# EAGLE board termo2 (EAGLE 6.2)

Size 160 x 100 mm. Coordinates in mm from the lower left corner, seen from the top.
Outline: 0,0 160,0 160,100 0,100 0,0
Copper layers (1*16): Top 0.035mm / dielectric 1.5mm / Bottom 0.035mm
Design rules: minimum track width 10mil, minimum drill 24mil, track to track 8mil, track to pad 8mil, pad to pad 8mil, via to via 8mil, smd to smd 8mil, copper to edge 40mil, drill to drill 8mil, minimum pad ring 10mil, minimum via ring 8mil, stop-mask expansion 4mil, vias tented up to drill 0mil, thermal gap 10mil

## Footprints (pad centres in the part's own frame; a part is rotated, then mirrored left to right if it is on the bottom)
8_PIN_CON = drill 1 pad 1.778 square: P$1 -12.7,0.635 | drill 1 pad 1.778: P$2 -8.89,0.635; P$3 -5.08,0.635; P$4 -1.27,0.635; P$5 2.54,0.635; P$6 6.35,0.635; P$7 10.16,0.635; P$8 13.97,0.635
C100MILX6X12 = drill 0.8 pad 1.422 octagon: MINUS 1.27,0 | drill 0.8 pad 1.422 square: PLUS -1.27,0
C0805D = smd 1.5 x 1.7: 1 -1.27,0; 2 1.27,0
C0603 = smd 1.1 x 1: 1 -0.85,0; 2 0.85,0
DIL08 = drill 0.8 pad 1.422 square: 1 -3.81,-3.81 | drill 0.8 pad 1.422 long: 2 -1.27,-3.81; 3 1.27,-3.81; 4 3.81,-3.81; 5 3.81,3.81; 6 1.27,3.81; 7 -1.27,3.81; 8 -3.81,3.81
DO41-10 = drill 1 pad 2.184 octagon: A 12.7,0 | drill 1 pad 2.184 square: C 0,0
NMA = drill 0.813 long: 1 0,6.35; 2 0,3.81; 4 0,-1.27; 5 0,-3.81; 6 0,-6.35
DIL08' = drill 0.813 pad 1.6 octagon: 1 -3.81,-3.81; 2 -1.27,-3.81; 3 1.27,-3.81; 4 3.81,-3.81; 5 3.81,3.81; 6 1.27,3.81; 7 -1.27,3.81; 8 -3.81,3.81
SO08 = smd 0.61 x 2.21: 1 -1.905,-2.616; 2 -0.635,-2.616; 3 0.635,-2.616; 4 1.905,-2.616; 5 1.905,2.616; 6 0.635,2.616; 7 -0.635,2.616; 8 -1.905,2.616
TO92-60 = drill 0.8 pad 1.422 octagon: 1 -1.524,0; 2 0,1.524; 3 1.524,0
SOT89-5 = smd 0.8 x 1.4: 1 -1.499,-1.981; 2 0,-1.981; 3 1.499,-1.981; 4 1.499,1.919; 5 -1.499,1.919; 21 0,1.919
DIL40 = drill 0.813 long: 1 -24.13,-7.62; 2 -21.59,-7.62; 3 -19.05,-7.62; 4 -16.51,-7.62; 5 -13.97,-7.62; 6 -11.43,-7.62; 7 -8.89,-7.62; 8 -6.35,-7.62; 9 -3.81,-7.62; 10 -1.27,-7.62; 11 1.27,-7.62; 12 3.81,-7.62; 13 6.35,-7.62; 14 8.89,-7.62; 15 11.43,-7.62; 16 13.97,-7.62; 17 16.51,-7.62; 18 19.05,-7.62; 19 21.59,-7.62; 20 24.13,-7.62; 21 24.13,7.62; 22 21.59,7.62; 23 19.05,7.62; 24 16.51,7.62; 25 13.97,7.62; 26 11.43,7.62; 27 8.89,7.62; 28 6.35,7.62; 29 3.81,7.62; 30 1.27,7.62; 31 -1.27,7.62; 32 -3.81,7.62; 33 -6.35,7.62; 34 -8.89,7.62; 35 -11.43,7.62; 36 -13.97,7.62; 37 -16.51,7.62; 38 -19.05,7.62; 39 -21.59,7.62; 40 -24.13,7.62
ADS1216_PAC = smd 0.25 x 1.5: 1 -2.52,-3.258; 2 -2.02,-3.258; 3 -1.52,-3.258; 4 -1.02,-3.258; 5 -0.52,-3.258; 6 -0.02,-3.258; 7 0.48,-3.258; 8 0.98,-3.258; 9 1.48,-3.258; 10 1.98,-3.258; 11 2.48,-3.258; 12 2.98,-3.258; 25 2.955,5.792; 26 2.455,5.792; 27 1.955,5.792; 28 1.455,5.792; 29 0.955,5.792; 30 0.455,5.792; 31 -0.045,5.792; 32 -0.545,5.792; 33 -1.045,5.792; 34 -1.545,5.792; 35 -2.045,5.792; 36 -2.533,5.785 | smd 1.5 x 0.25: 13 4.73,-1.483; 14 4.73,-0.983; 15 4.73,-0.483; 16 4.73,0.017; 17 4.73,0.517; 18 4.73,1.017; 19 4.73,1.517; 20 4.73,2.017; 21 4.73,2.517; 22 4.73,3.017; 23 4.73,3.517; 24 4.73,4.017; 37 -4.32,4.017; 38 -4.32,3.517; 39 -4.32,3.017; 40 -4.32,2.517; 41 -4.32,2.017; 42 -4.32,1.517; 43 -4.32,1.017; 44 -4.32,0.517; 45 -4.32,0.017; 46 -4.32,-0.483; 47 -4.32,-0.983; 48 -4.32,-1.483
CNY_DIP8 = drill 0.8 pad 1.422 square: 1 -3.81,-3.81 | drill 0.8 pad 1.422 long: 2 -1.27,-3.81; 3 1.27,-3.81; 4 3.81,-3.81; 5 3.81,3.81; 6 1.27,3.81; 7 -1.27,3.81; 8 -3.81,3.81
FUSE5X20 = drill 1.2 pad 3.81 octagon: P$1 -10,0; P$2 10,0
TQFP64-10X10 = smd 1.7 x 0.3: 1 -5.7,3.75; 2 -5.7,3.25; 3 -5.7,2.75; 4 -5.7,2.25; 5 -5.7,1.75; 6 -5.7,1.25; 7 -5.7,0.75; 8 -5.7,0.25; 9 -5.7,-0.25; 10 -5.7,-0.75; 11 -5.7,-1.25; 12 -5.7,-1.75; 13 -5.7,-2.25; 14 -5.7,-2.75; 15 -5.7,-3.25; 16 -5.7,-3.75; 33 5.7,-3.75; 34 5.7,-3.25; 35 5.7,-2.75; 36 5.7,-2.25; 37 5.7,-1.75; 38 5.7,-1.25; 39 5.7,-0.75; 40 5.7,-0.25; 41 5.7,0.25; 42 5.7,0.75; 43 5.7,1.25; 44 5.7,1.75; 45 5.7,2.25; 46 5.7,2.75; 47 5.7,3.25; 48 5.7,3.75 | smd 0.3 x 1.7: 17 -3.75,-5.7; 18 -3.25,-5.7; 19 -2.75,-5.7; 20 -2.25,-5.7; 21 -1.75,-5.7; 22 -1.25,-5.7; 23 -0.75,-5.7; 24 -0.25,-5.7; 25 0.25,-5.7; 26 0.75,-5.7; 27 1.25,-5.7; 28 1.75,-5.7; 29 2.25,-5.7; 30 2.75,-5.7; 31 3.25,-5.7; 32 3.75,-5.7; 49 3.75,5.7; 50 3.25,5.7; 51 2.75,5.7; 52 2.25,5.7; 53 1.75,5.7; 54 1.25,5.7; 55 0.75,5.7; 56 0.25,5.7; 57 -0.25,5.7; 58 -0.75,5.7; 59 -1.25,5.7; 60 -1.75,5.7; 61 -2.25,5.7; 62 -2.75,5.7; 63 -3.25,5.7; 64 -3.75,5.7
1_PIN_CON = drill 1 pad 1.676 octagon: P$1 0,0
HC49/S = drill 0.813: 1 -2.413,0; 2 2.413,0
V235/17 = drill 1.194 octagon: 1 -8.89,0; 2 8.89,0
R0805D = smd 1.5 x 1.7: P$1 -1.27,0; P$2 1.27,0
0207/10 = drill 0.8 pad 1.676 octagon: 1 -5.08,0; 2 5.08,0
RTRIM3329H = drill 0.8 pad 1.422 octagon: 1 -0.599,-2.024; 2 1.805,-1.985; 3 0.537,0.066
6_IN_PINS = drill 1 pad 1.422 square: P$1 0,0 | drill 1 pad 1.422 octagon: P$2 2.54,0; P$3 5.08,0; P$4 7.62,0; P$5 10.16,0; P$6 12.7,0
PLC-5PIN = drill 1 square: P$1 0,5.08 | drill 1 octagon: P$2 0,2.54; P$3 0,0; P$4 0,-2.54; P$5 0,-5.08
PLC-3PIN = drill 1 pad 1.778 square: P$1 0,0 | drill 1 pad 1.778 octagon: P$2 2.54,0; P$3 5.08,0
KM_RS_232 = drill 1 pad 1.778 square: 1 20.32,5.08 | drill 1 pad 1.778: 2 20.32,2.54; 3 20.32,0; 4 20.32,-2.54; 5 20.32,-5.08 | hole 3.2: -10.16,17.78; -10.16,-17.78; 17.78,17.78; 17.78,-17.78
WINSTAR16X4_12 = drill 1 pad 1.778 square: P$1 -13.97,1.27 | drill 1 pad 1.778 octagon: P$2 -11.43,1.27; P$3 -8.89,1.27; P$4 -6.35,1.27; P$5 -3.81,1.27; P$6 -1.27,1.27; P$7 1.27,1.27; P$8 3.81,1.27; P$9 6.35,1.27; P$10 8.89,1.27; P$11 11.43,1.27; P$12 13.97,1.27

## Placement (x,y rotation side)
8_PIN_  [8_PIN_CON]  -38.1,139.7 0 top  (outside the outline)
C1  [C100MILX6X12]  -41.91,100.33 0 top  (outside the outline)
C2  0.1u  [C0805D]  -97.79,110.49 0 top  (outside the outline)
C3  0.1u  [C0805D]  -102.87,110.49 0 top  (outside the outline)
C4  0.1u  [C0805D]  -107.95,110.49 0 top  (outside the outline)
C5  0.1u  [C0805D]  -113.03,110.49 0 top  (outside the outline)
C6  [C100MILX6X12]  -49.53,100.33 0 top  (outside the outline)
C7  [C0805D]  -15.24,139.7 0 top  (outside the outline)
C8  [C0805D]  -20.32,139.7 0 top  (outside the outline)
C9  [C100MILX6X12]  -57.15,100.33 0 top  (outside the outline)
C10  0.1u  [C0603]  -50.8,125.73 0 top  (outside the outline)
C11  0.1u  [C0805D]  -16.51,119.38 0 top  (outside the outline)
C12  [C0805D]  -27.94,134.62 0 top  (outside the outline)
C13  0.1u  [C0805D]  -21.59,119.38 0 top  (outside the outline)
C14  [C0805D]  -33.02,134.62 0 top  (outside the outline)
C15  0.01u  [C0805D]  -86.36,110.49 0 top  (outside the outline)
C16  1u  [C0805D]  -41.91,119.38 0 top  (outside the outline)
C17  0.1u  [C0603]  -55.88,125.73 0 top  (outside the outline)
C18  [C0805D]  -38.1,134.62 0 top  (outside the outline)
C19  12p  [C0805D]  -46.99,119.38 0 top  (outside the outline)
C20  0.1u  [C0805D]  -26.67,119.38 0 top  (outside the outline)
C21  1n  [C0603]  -76.2,125.73 0 top  (outside the outline)
C22  0.1u  [C0805D]  -31.75,119.38 0 top  (outside the outline)
C23  0.1u  [C0603]  -60.96,125.73 0 top  (outside the outline)
C24  12p  [C0805D]  -52.07,119.38 0 top  (outside the outline)
C25  0.1u  [C0603]  -66.04,125.73 0 top  (outside the outline)
C26  [C0603]  -55.88,139.7 0 top  (outside the outline)
C27  0.1u  [C0603]  -71.12,125.73 0 top  (outside the outline)
C28  0.1u  [C0805D]  -36.83,119.38 0 top  (outside the outline)
C29  [C100MILX6X12]  -64.77,100.33 0 top  (outside the outline)
C30  1u  [C0805D]  -57.15,119.38 0 top  (outside the outline)
C31  0.01u  [C0805D]  -92.71,110.49 0 top  (outside the outline)
C32  [C0805D]  -43.18,134.62 0 top  (outside the outline)
C33  [C0805D]  -48.26,134.62 0 top  (outside the outline)
C34  [C0805D]  -53.34,134.62 0 top  (outside the outline)
C35  [C0805D]  -58.42,134.62 0 top  (outside the outline)
C36  1n  [C0805D]  -62.23,119.38 0 top  (outside the outline)
C37  [C0805D]  -63.5,134.62 0 top  (outside the outline)
C38  [C0805D]  -68.58,134.62 0 top  (outside the outline)
C39  [C0805D]  -73.66,134.62 0 top  (outside the outline)
C40  0.1  [C0805D]  -67.31,119.38 0 top  (outside the outline)
C41  0.1  [C0805D]  -72.39,119.38 0 top  (outside the outline)
C42  0.1  [C0805D]  -77.47,119.38 0 top  (outside the outline)
C43  0.1  [C0805D]  -82.55,119.38 0 top  (outside the outline)
C44  12p  [C0805D]  -142.24,-11.43 0 top  (outside the outline)
C45  12p  [C0805D]  -142.24,-17.78 0 top  (outside the outline)
C46  0.1u  [C0603]  -156.21,-24.13 0 top  (outside the outline)
D1  6N137  [DIL08]  -106.68,69.85 0 top  (outside the outline)
D2  1N5061  [DO41-10]  -81.28,110.49 0 top  (outside the outline)
DA1  [NMA]  -74.93,38.1 0 top  (outside the outline)
DA2  INA128P  [DIL08']  -80.01,88.9 0 top  (outside the outline)
DA3  OPA340U  [SO08]  -92.71,87.63 0 top  (outside the outline)
DA4  DS1811  [TO92-60]  -27.94,100.33 0 top  (outside the outline)
DA5  NJM2880  [SOT89-5]  -104.14,88.9 0 top  (outside the outline)
DA6  PIC18F4320_40  [DIL40]  -36.83,54.61 0 top  (outside the outline)
DA7  ADS1216ADS1216  [ADS1216_PAC]  -54.61,77.47 270 top  (outside the outline)
DA8  NJM2880  [SOT89-5]  -19.05,101.6 0 top  (outside the outline)
DA9  CNY74-H  [CNY_DIP8]  -19.05,90.17 0 top  (outside the outline)
DA10  CNY74-H  [CNY_DIP8]  -34.29,90.17 0 top  (outside the outline)
FU1  [FUSE5X20]  -123.19,67.31 90 top  (outside the outline)
IC1  PIC24HJ64GP506  [TQFP64-10X10]  -151.13,-13.97 0 top  (outside the outline)
P1  1_PIN_CON  [1_PIN_CON]  -58.42,139.7 0 top  (outside the outline)
P2  1_PIN_CON  [1_PIN_CON]  -60.96,139.7 0 top  (outside the outline)
Q1  [HC49/S]  -49.53,109.22 0 top  (outside the outline)
Q2  [HC49/S]  -60.96,109.22 0 top  (outside the outline)
Q3  [HC49/S]  -138.43,-5.08 0 top  (outside the outline)
R1  100k  [V235/17]  -78.74,99.06 0 top  (outside the outline)
R2  100k  [V235/17]  -99.06,99.06 0 top  (outside the outline)
R3  50k  [V235/17]  -22.86,110.49 0 top  (outside the outline)
R4  10k  [R0805D]  -113.03,119.38 0 top  (outside the outline)
R5  330  [0207/10]  -83.82,124.46 0 top  (outside the outline)
R6  1k  [0207/10]  -96.52,124.46 0 top  (outside the outline)
R7  1k  [0207/10]  -109.22,124.46 0 top  (outside the outline)
R8  22R  [R0805D]  -87.63,119.38 0 top  (outside the outline)
R9  [RTRIM3329H]  -35.56,100.33 0 top  (outside the outline)
R10  22R  [R0805D]  -92.71,119.38 0 top  (outside the outline)
R11  100k  [0207/10]  -19.05,129.54 0 top  (outside the outline)
R12  4k7  [0207/10]  -31.75,129.54 0 top  (outside the outline)
R13  4k7  [0207/10]  -44.45,129.54 0 top  (outside the outline)
R14  4k7  [0207/10]  -57.15,129.54 0 top  (outside the outline)
R15  4k7  [0207/10]  -69.85,129.54 0 top  (outside the outline)
R16  [R0805D]  -78.74,134.62 0 top  (outside the outline)
R17  1k  [R0805D]  -97.79,119.38 0 top  (outside the outline)
R18  [R0805D]  -83.82,134.62 0 top  (outside the outline)
R19  [R0805D]  -88.9,134.62 0 top  (outside the outline)
R20  [R0805D]  -93.98,134.62 0 top  (outside the outline)
R21  [R0805D]  -99.06,134.62 0 top  (outside the outline)
R22  [R0805D]  -104.14,134.62 0 top  (outside the outline)
R23  [R0805D]  -109.22,134.62 0 top  (outside the outline)
R24  10k  [R0805D]  -102.87,119.38 0 top  (outside the outline)
R25  330  [0207/10]  -82.55,129.54 0 top  (outside the outline)
R26  330  [0207/10]  -95.25,129.54 0 top  (outside the outline)
R27  330  [0207/10]  -107.95,129.54 0 top  (outside the outline)
R28  330  [0207/10]  -19.05,134.62 0 top  (outside the outline)
R29  22R  [R0805D]  -107.95,119.38 0 top  (outside the outline)
X1  6_PIN_CON  [6_IN_PINS]  -58.42,88.9 0 top  (outside the outline)
X2  [PLC-5PIN]  -67.31,54.61 180 top  (outside the outline)
X3  [PLC-3PIN]  -40.64,109.22 0 top  (outside the outline)
X4  [KM_RS_232]  -36.83,21.59 0 top  (outside the outline)
X5  [WINSTAR16X4_12]  -27.94,125.73 0 top  (outside the outline)

## Library data of the parts
8_PIN_ DA7 DA9 DA10 P1 P2 R9 X1 X4 X5 = Dmitry
C1-C9 C11-C16 C18-C20 C22 C24 C28-C45 D1 D2 DA4 DA5 DA8 FU1 R4-R8 R10-R29 X2 X3 = den
C10 C17 C21 C23 C25-C27 C46 R1-R3 = rcl
DA1 = dc-dc-converter; MF: C & D TECHNOLOGIES, INC; MPN: NMA0515SC; OC_FARNELL: 1021434; OC_NEWARK: 61K3064
DA2 = burr-brown; MF: TEXAS INSTRUMENTS; MPN: INA128P; OC_FARNELL: 1212410; OC_NEWARK: 74C9783
DA3 = burr-brown; MPN: OPA340UA; OC_FARNELL: 1106196; OC_NEWARK: 24M5449
DA6 = microchip; MF: MICROCHIP; MPN: PIC18F4455-I/P; OC_FARNELL: 9321314; OC_NEWARK: 05K2028
IC1 = Dmitry; MPN: PIC24HJ64GP506A-I/PT; OC_FARNELL: 1146551; OC_NEWARK: 45P4882
Q1-Q3 = crystal; OC_FARNELL: 1667008; OC_NEWARK: unknown

## Nets
!CS!: DA7.33
!MCLR_MC: IC1.7 R4.P$1 X3.P$2
+5V: C1.PLUS C2.1 C4.2 C5.1 C11.2 C18.2 C20.1 C22.2 C29.PLUS C30.1 D1.7 D1.8 DA1.1 DA3.7 DA4.2 DA6.11 DA6.32 DA8.4 R4.P$2 R6.2 R9.2 R12.2 R13.2 R14.2 R15.2 X1.P$5 X2.P$2 X4.5 X5.P$2
+5V_AVDD: C10.2 C16.1 C23.2 C25.1 C26.2 C27.1 DA5.4 DA7.1 DA7.13 DA7.23 DA7.27 DA7.31
+6V: C13.2 C28.2 D2.C DA5.1 DA5.5 DA8.1 DA8.5 FU1.P$2 R7.1
AINCOM: DA7.11 R11.1
AVDD: IC1.19
AVSS: IC1.20
CAP/VDDCORE: IC1.56
D_IN: DA7.35 R10.P$2
D_OUT: DA7.36 R8.P$2
DB4: DA6.27 X5.P$7
DB5: DA6.28 X5.P$8
DB6: DA6.29 X5.P$9
DB7: DA6.30 X5.P$10
DRDY: DA6.5 DA7.32
DSYNC: DA6.6 DA7.29
E: DA6.19 X5.P$6
IN1.1: C36.1 C40.1 DA7.3 R17.P$1
IN1.2: C32.1 C40.2 DA7.4 R18.P$1
IN2.1: C37.1 C41.1 DA7.5 R19.P$1
IN2.2: C33.1 C41.2 DA7.6 R20.P$1
IN3.1: C38.1 C42.1 DA7.7 R23.P$1
IN3.2: C34.1 C42.2 DA7.8 R16.P$1
IN4.1: C39.1 C43.1 DA7.9 R21.P$1
IN4.2: C35.1 C43.2 DA7.10 R22.P$1
INA_OUT: DA3.3 R3.1
K1: X1.P$1
K2: R26.2 X1.P$2
K3: R27.1 X1.P$3
K4: R28.2 X1.P$4
KN1,PGD: DA9.7 IC1.18 R12.1 X2.P$4
KN2,PGC: DA9.6 IC1.17 R13.1 X2.P$5
KN3: DA6.38 DA10.7 R14.1
KN4: DA6.37 DA10.6 R15.1
MCLR: X2.P$1 X3.P$1
N$1: C19.2 DA6.13 Q2.1
N$2: C24.2 DA6.14 Q2.2
N$3: DA9.4 R26.1
N$4: C31.1 DA8.3
N$5: D1.6 DA6.35 R6.1
N$6: DA6.18 R29.P$2
N$7: C21.2 DA7.14
N$8: DA4.1 X3.P$3
N$9: DA6.24 R10.P$1
N$10: C14.2 DA7.25 Q1.2
N$11: C12.2 DA7.26 Q1.1
N$12: DA6.23 R8.P$1
N$13: 8_PIN_.P$6 R16.P$2
N$14: 8_PIN_.P$1 R17.P$2
N$15: 8_PIN_.P$2 R18.P$2
N$16: 8_PIN_.P$7 R21.P$2
N$17: DA10.1 R27.2
N$18: 8_PIN_.P$8 R22.P$2 R24.P$1
N$19: DA10.4 R28.1
N$20: R7.2 X5.P$11
N$28: 8_PIN_.P$5 R23.P$2
N$29: C6.PLUS C8.1 DA1.6 DA2.7
N$30: 8_PIN_.P$3 R19.P$2
N$31: 8_PIN_.P$4 R20.P$2
N$45: DA2.5 DA3.2 DA3.6
N$47: DA2.6 R1.2
N$51: C7.1 C9.MINUS DA1.4 DA2.4
N$56: X4.3
N$58: X4.2
N$62: R1.1 R2.2
N$63: R2.1 R3.2
N$105: C15.1 DA5.3
N$106: R25.1
N$109: D1.2 R5.1
N$110: D1.3 P1.P$1
N$112: P2.P$1 R5.2
OSC1: C44.2 IC1.39 Q3.1
OSC2: C45.2 IC1.40 Q3.2
PE: C1.MINUS C2.2 C3.2 C4.1 C5.2 C6.MINUS C7.2 C8.2 C9.PLUS C10.1 C11.1 C12.1 C13.1 C14.1 C15.2 C16.2 C17.2 C18.1 C19.1 C20.2 C21.1 C22.1 C23.1 C24.1 C25.2 C26.1 C27.2 C28.1 C29.MINUS C30.2 C31.2 C32.2 C33.2 C34.2 C35.2 C36.2 C37.2 C38.2 C39.2 C44.1 C45.1 C46.1 C46.2 D1.5 D2.A DA1.2 DA1.5 DA2.2 DA3.4 DA4.3 DA5.2 DA5.21 DA6.12 DA6.31 DA7.2 DA7.12 DA7.18 DA7.19 DA7.20 DA7.21 DA7.22 DA7.28 DA7.30 DA7.45 DA7.48 DA8.2 DA8.21 DA9.2 DA9.3 DA9.5 DA9.8 DA10.2 DA10.3 DA10.5 DA10.8 IC1.38 IC1.41 R9.1 R11.2 R24.P$2 X1.P$6 X2.P$3 X4.1 X5.P$1 X5.P$12
R15: DA9.1 R25.2
REF: C3.1 C17.1 DA2.3 DA7.46 DA7.47
RESET: DA6.7 DA7.24
RS: DA6.21 X5.P$4
RW: DA6.22 X5.P$5
SCLK: DA7.34 R29.P$1
TX_EN: DA6.20 X4.4
V0CON: R9.3 X5.P$3
VDD: FU1.P$1 IC1.10 IC1.26 IC1.57
VSS: IC1.9 IC1.25

## Tracks (layer width: path | path; a pad name or v marks a point on that pad's centre or on a via)
!MCLR_MC  (2 unrouted)
+5V  (28 unrouted)
+5V_AVDD  (11 unrouted)
+6V  (8 unrouted)
AINCOM  (1 unrouted)
D_IN  (1 unrouted)
D_OUT  (1 unrouted)
DB4  (1 unrouted)
DB5  (1 unrouted)
DB6  (1 unrouted)
DB7  (1 unrouted)
DRDY  (1 unrouted)
DSYNC  (1 unrouted)
E  (1 unrouted)
IN1.1  (3 unrouted)
IN1.2  (3 unrouted)
IN2.1  (3 unrouted)
IN2.2  (3 unrouted)
IN3.1  (3 unrouted)
IN3.2  (3 unrouted)
IN4.1  (3 unrouted)
IN4.2  (3 unrouted)
INA_OUT  (1 unrouted)
K2  (1 unrouted)
K3  (1 unrouted)
K4  (1 unrouted)
KN1,PGD  (3 unrouted)
KN2,PGC  (3 unrouted)
KN3  (2 unrouted)
KN4  (2 unrouted)
MCLR  (1 unrouted)
N$1  (2 unrouted)
N$2  (2 unrouted)
N$3  (1 unrouted)
N$4  (1 unrouted)
N$5  (2 unrouted)
N$6  (1 unrouted)
N$7  (1 unrouted)
N$8  (1 unrouted)
N$9  (1 unrouted)
N$10  (2 unrouted)
N$11  (2 unrouted)
N$12  (1 unrouted)
N$13  (1 unrouted)
N$14  (1 unrouted)
N$15  (1 unrouted)
N$16  (1 unrouted)
N$17  (1 unrouted)
N$18  (2 unrouted)
N$19  (1 unrouted)
N$20  (1 unrouted)
N$28  (1 unrouted)
N$29  (3 unrouted)
N$30  (1 unrouted)
N$31  (1 unrouted)
N$45  (2 unrouted)
N$47  (1 unrouted)
N$51  (3 unrouted)
N$62  (1 unrouted)
N$63  (1 unrouted)
N$105  (1 unrouted)
N$109  (1 unrouted)
N$110  (1 unrouted)
N$112  (1 unrouted)
OSC1  (2 unrouted)
OSC2  (2 unrouted)
PE  (84 unrouted)
R15  (1 unrouted)
REF  (4 unrouted)
RESET  (1 unrouted)
RS  (1 unrouted)
RW  (1 unrouted)
SCLK  (1 unrouted)
TX_EN  (1 unrouted)
V0CON  (1 unrouted)
VDD  (3 unrouted)
VSS  (1 unrouted)